# EAGLE board capstone (EAGLE 9.5.2)
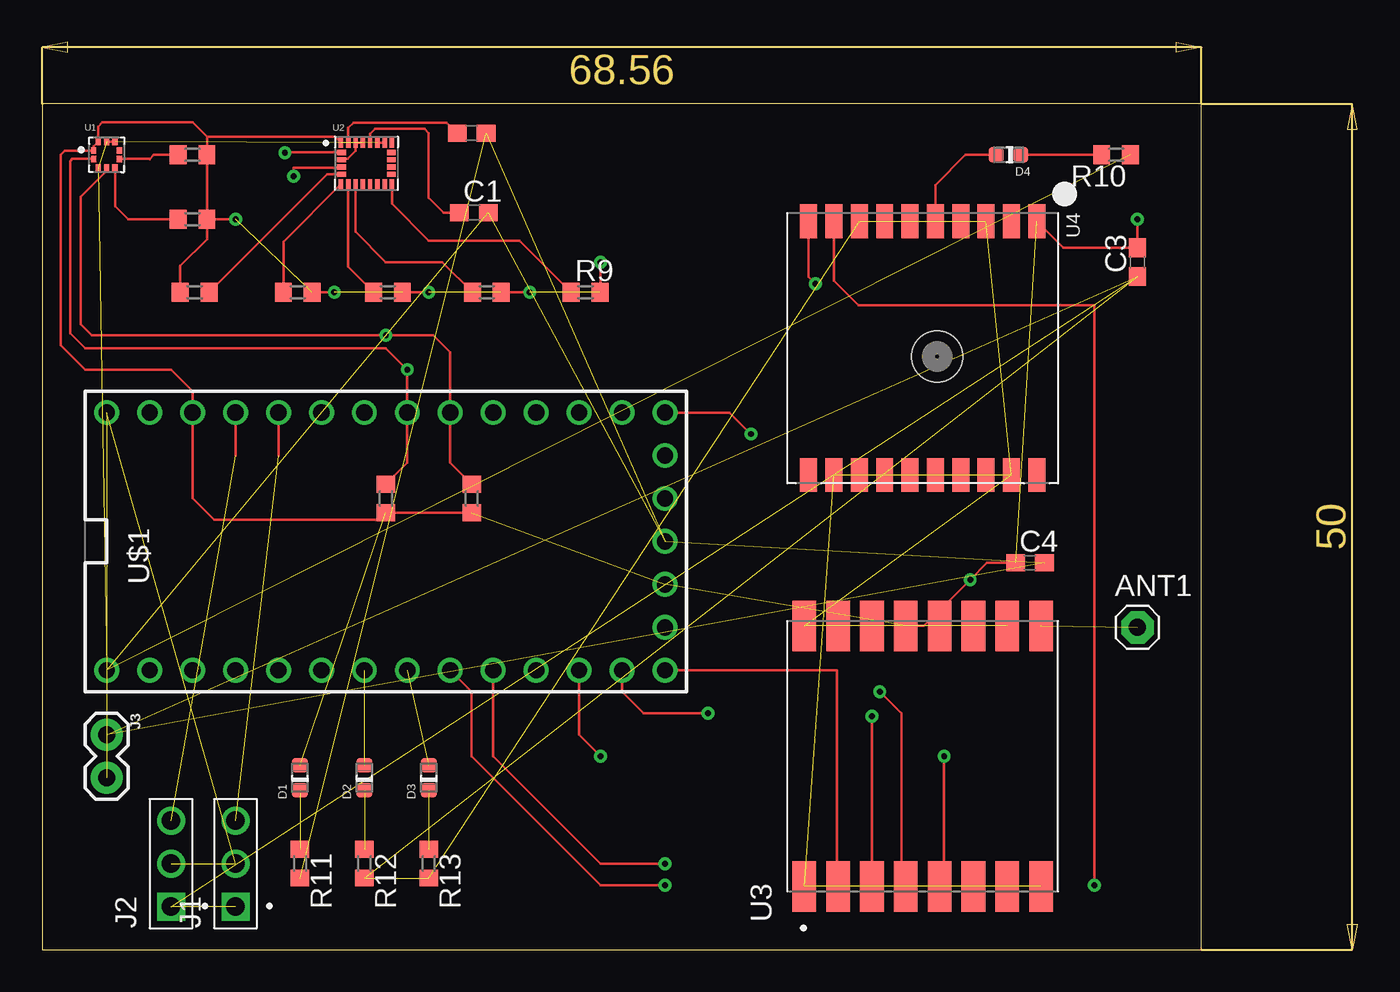
[diagram p0: board, top side]
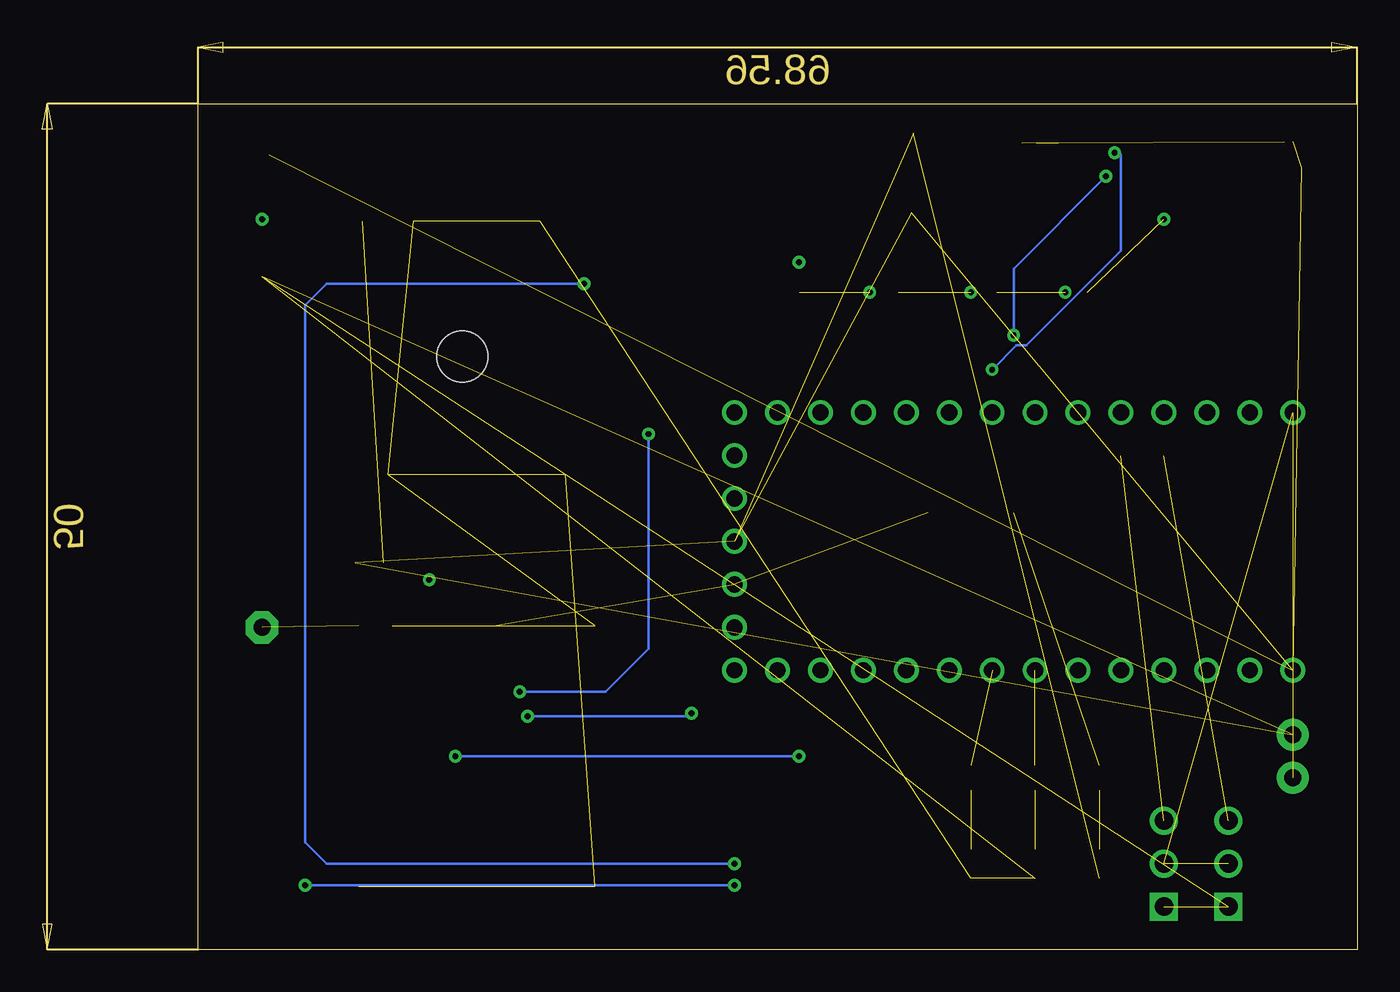
[diagram p1: board, bottom side, seen from below]

Size 68.56 x 50 mm. Coordinates in mm from the lower left corner, seen from the top.
Outline: 0,0 68.56,0 68.56,50 0,50 0,0
Copper layers (1*16): Top 0.035mm / dielectric 1.5mm / Bottom 0.035mm
Design rules "default": minimum track width 6mil, minimum drill 0.35mm, track to track 6mil, track to pad 6mil, pad to pad 6mil, via to via 6mil, smd to smd 6mil, copper to edge 40mil, drill to drill 6mil, minimum pad ring 10mil, minimum via ring 8mil, stop-mask expansion 4mil, vias tented up to drill 0mil, thermal gap 10mil

## Footprints (pad centres in the part's own frame; a part is rotated, then mirrored left to right if it is on the bottom)
1X01 = drill 1.016 pad 1.93 octagon: 1 0,0
C0603 = smd 1.1 x 1: 1 -0.85,0; 2 0.85,0
LED-0603 = smd 0.86 x 0.93: A 0.735,0; C -0.735,0
61300311121 = drill 1.1 square: 1 -2.54,0 | drill 1.1: 2 0,0; 3 2.54,0
1X02 = drill 1.016 pad 1.88: 1 0,0; 2 2.54,0
R0603 = smd 1 x 1.1: 1 -0.85,0; 2 0.85,0
PQFN50P200X200X80-10N = smd 0.35 x 0.38: 1 -0.765,0.25; 2 -0.765,-0.25; 3 -0.5,-0.765; 4 0,-0.765; 5 0.5,-0.765; 6 0.765,-0.25; 7 0.765,0.25; 8 0.5,0.765; 9 0,0.765; 10 -0.5,0.765
PQFN43P300X350X102-24N = smd 0.28 x 0.53: 1 -1.505,1.22; 6 -1.505,-1.22; 7 -1.075,-1.22; 8 -0.645,-1.22; 9 -0.215,-1.22; 10 0.215,-1.22; 11 0.645,-1.22; 12 1.075,-1.22; 13 1.505,-1.22; 18 1.505,1.22; 19 1.075,1.22; 20 0.645,1.22; 21 0.215,1.22; 22 -0.215,1.22; 23 -0.645,1.22; 24 -1.075,1.22 | smd 0.53 x 0.28: 2 -1.47,0.645; 3 -1.47,0.215; 4 -1.47,-0.215; 5 -1.47,-0.645; 14 1.47,-0.645; 15 1.47,-0.215; 16 1.47,0.215; 17 1.47,0.645
XCVR_RFM95W-915S2 = smd 3 x 1.4: 1 -7.7,7; 2 -7.7,5; 3 -7.7,3; 4 -7.7,1; 5 -7.7,-1; 6 -7.7,-3; 7 -7.7,-5; 8 -7.7,-7; 9 7.7,-7; 10 7.7,-5; 11 7.7,-3; 12 7.7,-1; 13 7.7,1; 14 7.7,3; 15 7.7,5; 16 7.7,7
FGPMMOPA6H = smd 2 x 1: P$1 -7.5,6.75; P$2 -7.5,5.25; P$3 -7.5,3.75; P$4 -7.5,2.25; P$5 -7.5,0.75; P$6 -7.5,-0.75; P$7 -7.5,-2.25; P$8 -7.5,-3.75; P$9 -7.5,-5.25; P$10 -7.5,-6.75; P$11 7.5,-6.75; P$12 7.5,-5.25; P$13 7.5,-3.75; P$14 7.5,-2.25; P$15 7.5,-0.75; P$16 7.5,0.75; P$17 7.5,2.25; P$18 7.5,3.75; P$19 7.5,5.25; P$20 7.5,6.75 | hole 3: 0.5,0.85
TEENSY_3.0-3.2&LC_OUTER_ROW = drill 0.965: 0 -7.62,13.97; 1 -7.62,11.43; 2 -7.62,8.89; 3 -7.62,6.35; 3.3V 7.62,11.43; 3.3V1 -2.54,-16.51; 4 -7.62,3.81; 5 -7.62,1.27; 6 -7.62,-1.27; 7 -7.62,-3.81; 8 -7.62,-6.35; 9 -7.62,-8.89; 10 -7.62,-11.43; 11 -7.62,-13.97; 12 -7.62,-16.51; 13 7.62,-16.51; 14/A0 7.62,-13.97; 15/A1 7.62,-11.43; 16/A2 7.62,-8.89; 17/A3 7.62,-6.35; 18/A4 7.62,-3.81; 19/A5 7.62,-1.27; 20/A6 7.62,1.27; 21/A7 7.62,3.81; 22/A8 7.62,6.35; 23/A9 7.62,8.89; AGND 7.62,13.97; GND -7.62,16.51; GND1 0,-16.51; PGM 2.54,-16.51; RESET/DAC 5.08,-16.51; VBAT -5.08,-16.51; VIN 7.62,16.51

## Placement (x,y rotation side)
ANT1  [1X01]  64.77,19.05 0 top
C1  10 uF  [C0603]  25.53,43.56 0 top
C2  100 nF  [C0603]  25.4,48.26 0 top
C3  0.1 uF  [C0603]  64.77,40.64 90 top
C4  10 uF  [C0603]  58.42,22.86 0 top
D1  HSMH-C190  [LED-0603]  15.24,10.16 90 top
D2  HSMH-C190  [LED-0603]  19.05,10.16 90 top
D3  HSMH-C190  [LED-0603]  22.86,10.16 90 top
D4  HSMH-C190  [LED-0603]  57.15,46.99 180 top
J1  61300311121  [61300311121]  11.43,5.08 90 top
J2  61300311121  [61300311121]  7.62,5.08 90 top
J3  [1X02]  3.81,12.7 270 top
R1  10k  [R0603]  8.89,46.99 0 top
R2  10k  [R0603]  8.89,43.18 0 top
R3  4.7k  [R0603]  25.4,26.67 270 top
R4  4.7k  [R0603]  20.32,26.67 90 top
R5  10k  [R0603]  9.02,38.86 180 top
R6  10k  [R0603]  15.11,38.86 0 top
R7  10k  [R0603]  20.45,38.86 0 top
R8  10k  [R0603]  26.29,38.86 0 top
R9  10k  [R0603]  32.13,38.86 0 top
R10  470  [R0603]  63.5,46.99 180 top
R11  100 Ohm  [R0603]  15.24,5.08 270 top
R12  100 Ohm  [R0603]  19.05,5.08 270 top
R13  100 Ohm  [R0603]  22.86,5.08 270 top
U1  BMP388  [PQFN50P200X200X80-10N]  3.81,46.99 0 top
U2  LSM9DS1TR  [PQFN43P300X350X102-24N]  19.18,46.48 0 top
U3  RFM95W-915S2  [XCVR_RFM95W-915S2]  52.07,11.43 90 top
U4  [FGPMMOPA6H]  52.07,35.56 270 top
U$1  TEENSY_3.1-3.2_OUTER_ROW  [TEENSY_3.0-3.2&LC_OUTER_ROW]  20.32,24.13 90 top

## Library data of the parts
ANT1 U4 = adafruit
C1-C4 R1-R13 = resistor
D1-D4 = LED; CREATED_BY: PCBLayout.com; DIGIKEY_PART_NUMBER: 516-1420-1-ND; MANUFACTURER: Broadcom Limited; MPN: HSMH-C190; PACKAGE: 0603
J1 J2 = Headers; CREATED_BY: PCBLayout.com; DIGI_KEY_PART_NUMBER: 732-5316-ND; MANUFACTURER: Wurth Electronics Inc.; MPN: 61300311121
J3 = SparkFun-Connectors
U1 = BMP388; DESCRIPTION: P-Sensor SPI I2C 1, 25 Bar SMD; DIGI-KEY_PART_NUMBER: 828-1079-1-ND; DIGI-KEY_PURCHASE_URL: https://www.digikey.ca/product-detail/en/bosch-sensortec/BMP388/828-1079-1-ND/8322640?utm_source=snapeda&utm_medium=aggregator&utm_campaign=symbol; MF: Bosch Sensortec; MP: BMP388; PACKAGE: WFLGA-10 Bosch Tools
U2 = LSM9DS1TR; DESCRIPTION: LSM9DS1 Series ±2/±4/±8/±16 g 3D Digital Linear Acceleration Sensor - LGA-24; DIGI-KEY_PART_NUMBER: 497-14946-1-ND; DIGI-KEY_PURCHASE_URL: https://www.digikey.ca/product-detail/en/stmicroelectronics/LSM9DS1TR/497-14946-1-ND/4988079?utm_source=snapeda&utm_medium=aggregator&utm_campaign=symbol; MF: STMicroelectronics; MP: LSM9DS1TR; PACKAGE: TFLGA-24 STMicroelectronics
U3 = RFM95W-915S2; DESCRIPTION: RFM95W LoRA Transceiver Module 915MHz; DIGI-KEY_PART_NUMBER: RFM95W-915S2-ND; DIGI-KEY_PURCHASE_URL: https://www.digikey.ca/product-detail/en/rf-solutions/RFM95W-915S2/RFM95W-915S2-ND/6564923?utm_source=snapeda&utm_medium=aggregator&utm_campaign=symbol; MF: RF Solutions; MP: RFM95W-915S2; PACKAGE: SMD-16 RF Solutions
U$1 = Teensy_3_and_LC_Series_Boards_v1.4

## Nets
+3V3: C3.2 C4.1 D1.A R1.2 R2.2 R3.2 R4.1 R5.2 R6.2 R7.2 R8.2 R9.2 U1.1 U1.10 U2.1 U2.3 U2.22 U2.23 U3.13 U4.P$1 U$1.3.3V U$1.3.3V1
AGND: U$1.AGND
ANT1: ANT1.1 U3.9
BMP388_ADR: R2.1 U1.5
BMP388_CS: R1.1 U1.6
BMP388_INT: U1.7
GND: C1.2 C2.2 C3.1 C4.2 J1.1 J2.1 J3.1 R10.1 R11.2 R12.2 R13.2 U1.3 U1.8 U1.9 U2.19 U2.20 U3.1 U3.7 U3.8 U3.10 U3.11 U3.12 U3.14 U3.15 U3.16 U4.P$3 U4.P$8 U4.P$12 U4.P$19 U$1.GND U$1.GND1
GPS_1PPS: U4.P$13
GPS_CS: U3.5 U$1.10
GPS_RESET: U3.6
GPS_RX: U4.P$10 U$1.8
GPS_TX: U4.P$9 U$1.7
LED1: D2.A U$1.5
LED2: D3.A U$1.6
LSM_CS_AG: R7.1 U2.7
LSM_CS_M: R8.1 U2.8
LSM_DEN_AG: R9.1 U2.13
LSM_INT1_AG: U2.11
LSM_INT2_AG: U2.12
LSM_INT_M: U2.10
LSM_M_RDY: U2.9
LSM_SDO_AG: R5.1 U2.5
LSM_SDO_M: R6.1 U2.6
MISO: U3.2 U$1.12
MOSI: U3.3 U$1.11
N$1: C1.1 U2.21
N$2: C2.1 U2.24
N$3: D4.C R10.2
N$4: D4.A U4.P$5
N$5: D1.C R11.1
N$6: D2.C R12.1
N$7: D3.C R13.1
SCK: U3.4 U$1.13
SCL: R4.2 U1.2 U2.2 U$1.19/A5
SDA: R3.1 U1.4 U2.4 U$1.18/A4
SERVO1: J1.3 U$1.22/A8
SERVO2: J2.3 U$1.23/A9
VBACKUP: U4.P$4
VBAT: U$1.VBAT
VIN: J1.2 J2.2 J3.2 U$1.VIN

## Tracks (layer width: path | path; a pad name or v marks a point on that pad's centre or on a via)
+3V3  (via drill 0.35)  (10 unrouted)
  Top 0.152: U1.10 3.04,47.49 U1.1 1.34,47.24 1.09,46.99 1.09,35.74 2.54,34.29 7.62,34.29 8.89,33.02 U$1.3.3V 8.89,26.67 10.16,25.4 19.9,25.4 R4.1 R3.2 | U2.22 18.54,47.7 18.54,47.24 18.06,46.76 17.77,46.76 U2.3 | U1.10 3.41,47.85 | R2.2 R1.2 9.74,48.06 | U1.10 3.31,48.63 3.3,48.64 3.3,48.65 3.56,48.91 8.89,48.91 9.74,48.06 | R6.2 v17.27,38.86 | R7.2 v22.86,38.86 | R8.2 v28.83,38.86 | R9.2 33.02,38.9 v33.02,40.64 | R2.2 11.3,43.18 | R2.2 v11.43,43.18 | R5.2 8.17,40.42 9.74,42 R2.2 | 9.74,48.06 17.32,48.06 U2.1 | U4.P$1 60.39,41.49 C3.2 v64.77,43.18 | C4.1 55.88,22.86 v54.88,21.86 52.15,19.13 U3.13
ANT1  (1 unrouted)
BMP388_ADR
  Top 0.152: U1.5 4.31,43.95 5.08,43.18 R2.1
BMP388_CS
  Top 0.152: U1.6 6.35,46.74 6.6,46.99 R1.1
GND  (28 unrouted)
  Top 0.152: U1.9 U1.8 | U2.20 U2.19
GPS_CS  (via drill 0.35)
  Top 0.152: U3.5 53.34,3.73 v53.34,11.43 | v33.02,11.43 31.75,12.7 U$1.10
  Bottom 0.152: v53.34,11.43 v33.02,11.43
GPS_RX  (via drill 0.35)
  Top 0.152: U$1.8 26.67,11.43 33.02,5.08 v36.83,5.08 | v45.72,39.37 45.32,39.77 U4.P$10
  Bottom 0.152: v36.83,5.08 60.96,5.08 62.23,6.35 62.23,38.1 60.96,39.37 v45.72,39.37
GPS_TX  (via drill 0.35)
  Top 0.152: U$1.7 25.4,15.24 25.4,11.43 33.02,3.81 v36.83,3.81 | v62.23,3.81 62.23,38.1 48.26,38.1 46.82,39.54 U4.P$9
  Bottom 0.152: v36.83,3.81 v62.23,3.81
LED1  (1 unrouted)
LED2  (1 unrouted)
LSM_CS_AG
  Top 0.152: R7.1 18.1,40.36 U2.7
LSM_CS_M
  Top 0.152: R8.1 23.66,40.64 20.32,40.64 18.53,42.43 U2.8
LSM_DEN_AG
  Top 0.152: R9.1 28.23,41.91 22.86,41.91 20.68,44.09 U2.13
LSM_SDO_AG
  Top 0.152: R5.1 16.84,45.84 U2.5
LSM_SDO_M
  Top 0.152: R6.1 14.26,41.85 U2.6
MISO
  Top 0.152: U3.2 46.99,3.81 46.99,16.51 U$1.12
MOSI  (via drill 0.35)
  Top 0.152: U3.3 v49.07,13.79 49.02,13.84 | v39.37,13.97 35.56,13.97 34.29,15.24 U$1.11
  Bottom 0.152: v49.07,13.79 39.55,13.79 v39.37,13.97
N$1
  Top 0.152: U2.21 19.39,48.22 19.68,48.51 22.61,48.51 22.86,48.26 22.86,44.45 23.75,43.56 C1.1
N$2
  Top 0.152: U2.24 18.1,48.58 18.41,48.9 23.91,48.9 C2.1
N$3
  Top 0.152: D4.C R10.2
N$4
  Top 0.152: D4.A 54.61,46.99 52.82,45.2 U4.P$5
N$5  (1 unrouted)
N$6  (1 unrouted)
N$7  (1 unrouted)
SCK  (via drill 0.35)
  Top 0.152: v49.53,15.24 50.8,13.97 50.8,4 U3.4 | v41.91,30.48 40.64,31.75 U$1.13
  Bottom 0.152: v49.53,15.24 44.45,15.24 41.91,17.78 v41.91,30.48
SCL  (via drill 0.35)
  Top 0.152: U1.2 1.78,46.74 1.65,46.61 1.65,36.45 2.54,35.56 20.32,35.56 v21.59,34.29 U$1.19/A5 21.59,28.79 R4.2 | U2.2 14.36,47.13 v14.35,47.12
  Bottom 0.152: v21.59,34.29 20.16,35.72 19.56,35.72 13.97,41.31 13.97,46.99 14.22,46.99 v14.35,47.12
SDA  (via drill 0.35)
  Top 0.152: U1.4 3.71,46.13 3.71,45.95 2.29,44.52 2.29,36.96 2.92,36.32 v20.32,36.32 23.11,36.32 24.13,35.31 U$1.18/A4 24.13,28.79 R3.1 | U2.4 17.67,46.23 14.86,46.23 v14.86,45.72
  Bottom 0.152: v14.86,45.72 20.32,40.26 v20.32,36.32
SERVO1  (1 unrouted)
  Top 0.152: U$1.22/A8 13.97,29.21
SERVO2  (1 unrouted)
  Top 0.152: U$1.23/A9 11.43,29.21
VIN  (3 unrouted)